# EAGLE board dolly2 (EAGLE 9.1.0)

Size 100 x 80 mm. Coordinates in mm from the lower left corner, seen from the top.
Outline: 0,0 100,0 100,80 0,80 0,0
Copper layers (1*16): Top 0.035mm / dielectric 1.5mm / Bottom 0.035mm
Design rules "default": minimum track width 6mil, minimum drill 0.35mm, track to track 6mil, track to pad 6mil, pad to pad 6mil, via to via 6mil, smd to smd 6mil, copper to edge 40mil, drill to drill 6mil, minimum pad ring 10mil, minimum via ring 8mil, stop-mask expansion 4mil, vias tented up to drill 0mil, thermal gap 10mil

## Footprints (pad centres in the part's own frame; a part is rotated, then mirrored left to right if it is on the bottom)
BATTCOM_20MM_PTH = drill 1.3: 1 11.85,0; 2 -8.15,0
LED5MM = drill 0.813 pad 1.676 octagon: A -1.27,0; K 1.27,0
AXIAL-0.3 = drill 0.9 pad 1.88: P$1 -3.81,0; P$2 3.81,0
EG1218 = drill 0.9 pad 1.676: O -2.54,0; P 0,0; S 2.54,0
PDIP08_300MIL = drill 0.813: 1 -3.81,-3.81; 2 -1.27,-3.81; 3 1.27,-3.81; 4 3.81,-3.81; 5 3.81,3.81; 6 1.27,3.81; 7 -1.27,3.81; 8 -3.81,3.81

## Placement (x,y rotation side)
BT1  [BATTCOM_20MM_PTH]  -26.67,11.43 0 top  (outside the outline)
LED1  [LED5MM]  -35.56,34.29 0 top  (outside the outline)
LED2  [LED5MM]  -48.26,34.29 0 top  (outside the outline)
LED3  [LED5MM]  -60.96,34.29 0 top  (outside the outline)
LED4  [LED5MM]  -21.59,41.91 0 top  (outside the outline)
LED5  [LED5MM]  -34.29,41.91 0 top  (outside the outline)
LED6  [LED5MM]  -46.99,41.91 0 top  (outside the outline)
LED7  [LED5MM]  -59.69,41.91 0 top  (outside the outline)
LED8  [LED5MM]  -21.59,49.53 0 top  (outside the outline)
LED9  [LED5MM]  -34.29,49.53 0 top  (outside the outline)
LED10  [LED5MM]  -22.86,26.67 0 top  (outside the outline)
LED11  [LED5MM]  -22.86,34.29 0 top  (outside the outline)
LED12  [LED5MM]  -35.56,26.67 0 top  (outside the outline)
LED13  [LED5MM]  -48.26,26.67 0 top  (outside the outline)
LED14  [LED5MM]  -60.96,26.67 0 top  (outside the outline)
R1  10k  [AXIAL-0.3]  -55.88,48.26 0 top  (outside the outline)
R2  10k  [AXIAL-0.3]  -17.78,55.88 0 top  (outside the outline)
R3  10k  [AXIAL-0.3]  -27.94,55.88 0 top  (outside the outline)
R4  10k  [AXIAL-0.3]  -38.1,55.88 0 top  (outside the outline)
R5  10k  [AXIAL-0.3]  -48.26,55.88 0 top  (outside the outline)
R6  10k  [AXIAL-0.3]  -58.42,55.88 0 top  (outside the outline)
R7  10k  [AXIAL-0.3]  -17.78,59.69 0 top  (outside the outline)
R8  10k  [AXIAL-0.3]  -27.94,59.69 0 top  (outside the outline)
R9  10k  [AXIAL-0.3]  -38.1,59.69 0 top  (outside the outline)
R10  10k  [AXIAL-0.3]  -48.26,59.69 0 top  (outside the outline)
R11  10k  [AXIAL-0.3]  -58.42,59.69 0 top  (outside the outline)
R12  10k  [AXIAL-0.3]  -17.78,63.5 0 top  (outside the outline)
R13  10k  [AXIAL-0.3]  -27.94,63.5 0 top  (outside the outline)
R14  10k  [AXIAL-0.3]  -38.1,63.5 0 top  (outside the outline)
S1  [EG1218]  -44.45,48.26 0 top  (outside the outline)
U1  ATTINY85-20P  [PDIP08_300MIL]  -49.53,6.35 0 top  (outside the outline)

## Library data of the parts
BT1 = SparkFun-Batteries; PROD_ID: BATT-09031; SF_SKU: PRT-00783
LED1-LED14 S1 = adafruit
R1-R14 = SparkFun-Resistors; PROD_ID: RES-12183
U1 = _hhn_attiny25_45_85

## Nets
N$1: LED1.A R1.P$1
N$2: BT1.1 S1.O
N$3: LED3.A R3.P$1
N$4: LED1.K LED2.K LED3.K LED4.K LED5.K LED6.K LED7.K LED8.K LED9.K LED10.K LED11.K LED12.K LED13.K LED14.K U1.5
N$5: BT1.2 U1.4
N$6: R1.P$2 R2.P$2 R3.P$2 R4.P$2 R5.P$2 R6.P$2 R7.P$2 R8.P$2 R9.P$2 R10.P$2 R11.P$2 R12.P$2 R13.P$2 R14.P$2 S1.P U1.8
N$7: LED4.A R4.P$1
N$8: LED5.A R5.P$1
N$9: LED6.A R6.P$1
N$10: LED7.A R7.P$1
N$11: LED8.A R8.P$1
N$12: LED9.A R9.P$1
N$13: LED10.A R10.P$1
N$14: LED11.A R11.P$1
N$15: LED12.A R12.P$1
N$16: LED13.A R13.P$1
N$17: LED14.A R14.P$1
N$18: LED2.A R2.P$1

## Tracks (layer width: path | path; a pad name or v marks a point on that pad's centre or on a via)
N$1  (1 unrouted)
N$2  (1 unrouted)
N$3  (1 unrouted)
N$4  (14 unrouted)
N$5  (1 unrouted)
N$6  (15 unrouted)
N$7  (1 unrouted)
N$8  (1 unrouted)
N$9  (1 unrouted)
N$10  (1 unrouted)
N$11  (1 unrouted)
N$12  (1 unrouted)
N$13  (1 unrouted)
N$14  (1 unrouted)
N$15  (1 unrouted)
N$16  (1 unrouted)
N$17  (1 unrouted)
N$18  (1 unrouted)

## Text on the board
tPlace: /Users/chrisbuckner/badges/dolly/dollybadge22bit.bmp